# Altium PCB PCB1.(final) (1).PcbDoc (part 1 of 2)
Units mm, origin at the board's own origin, x right, y up, seen from the top; angles counter-clockwise.
Board outline 85 x 55 mm, 2 copper layers (Top Layer, Bottom Layer); 59 components, 57 nets, 310 pads, 123 vias.
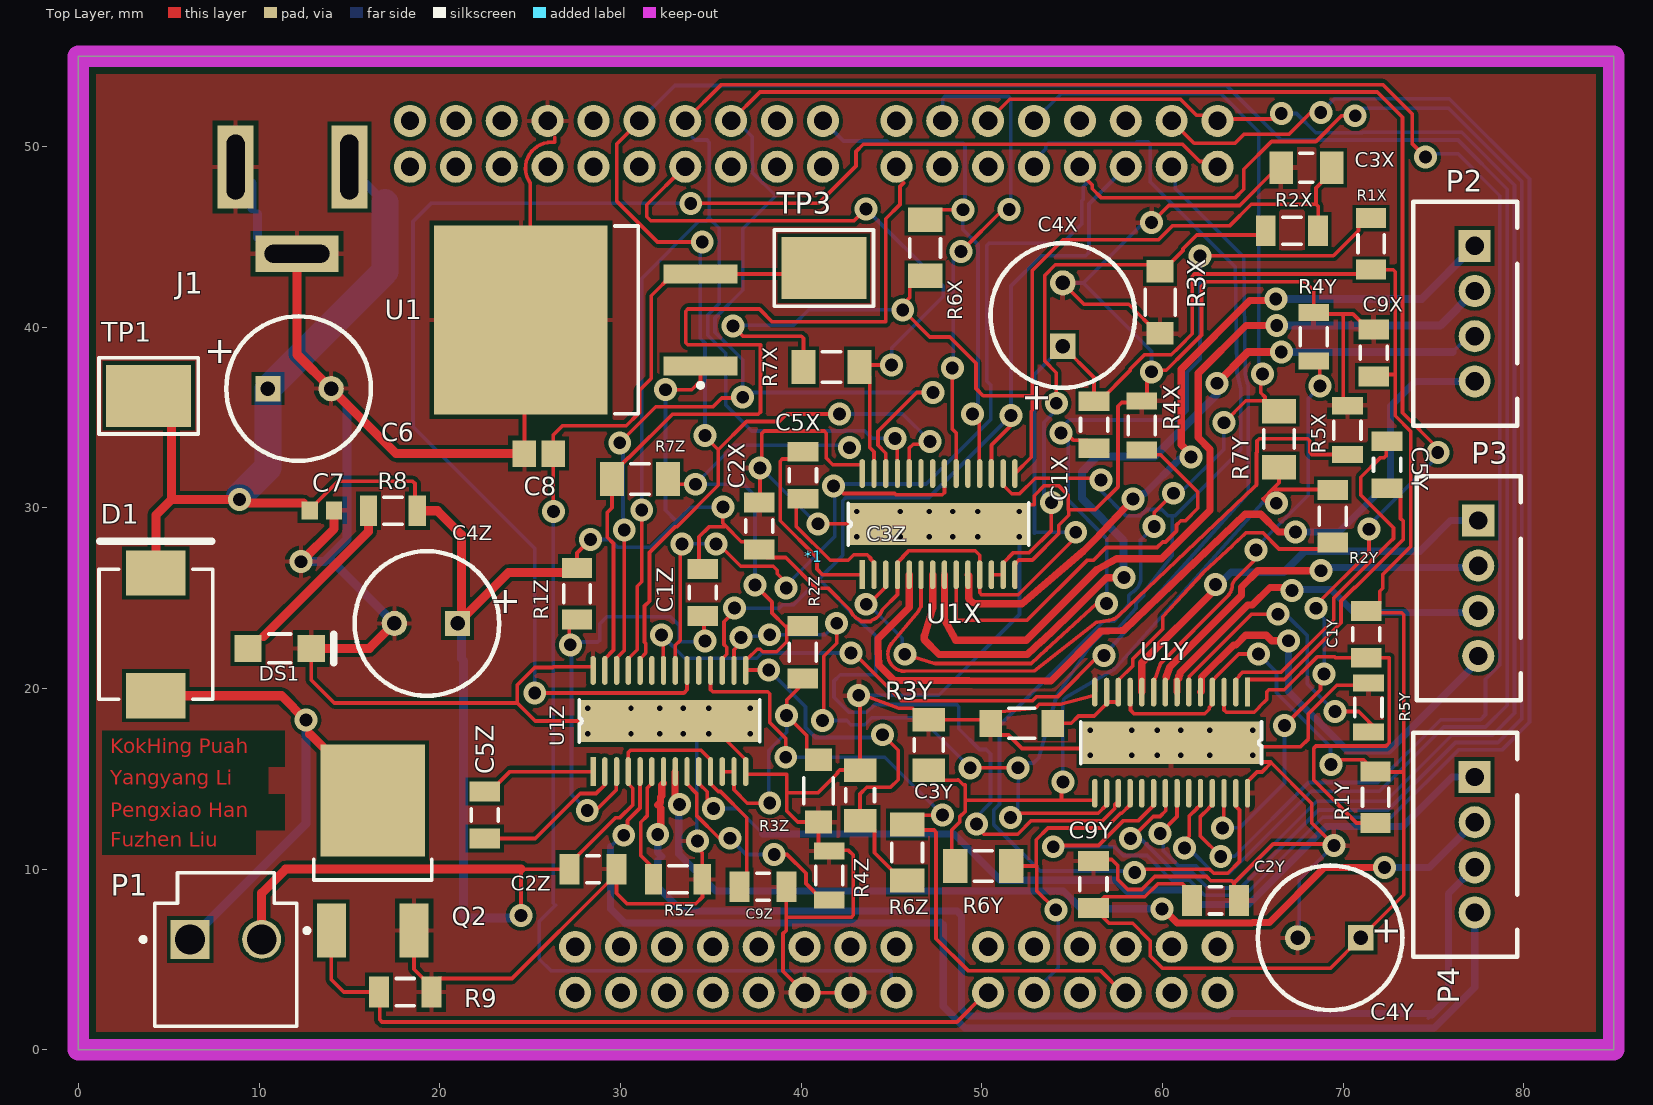
[diagram p0: Top Layer view]
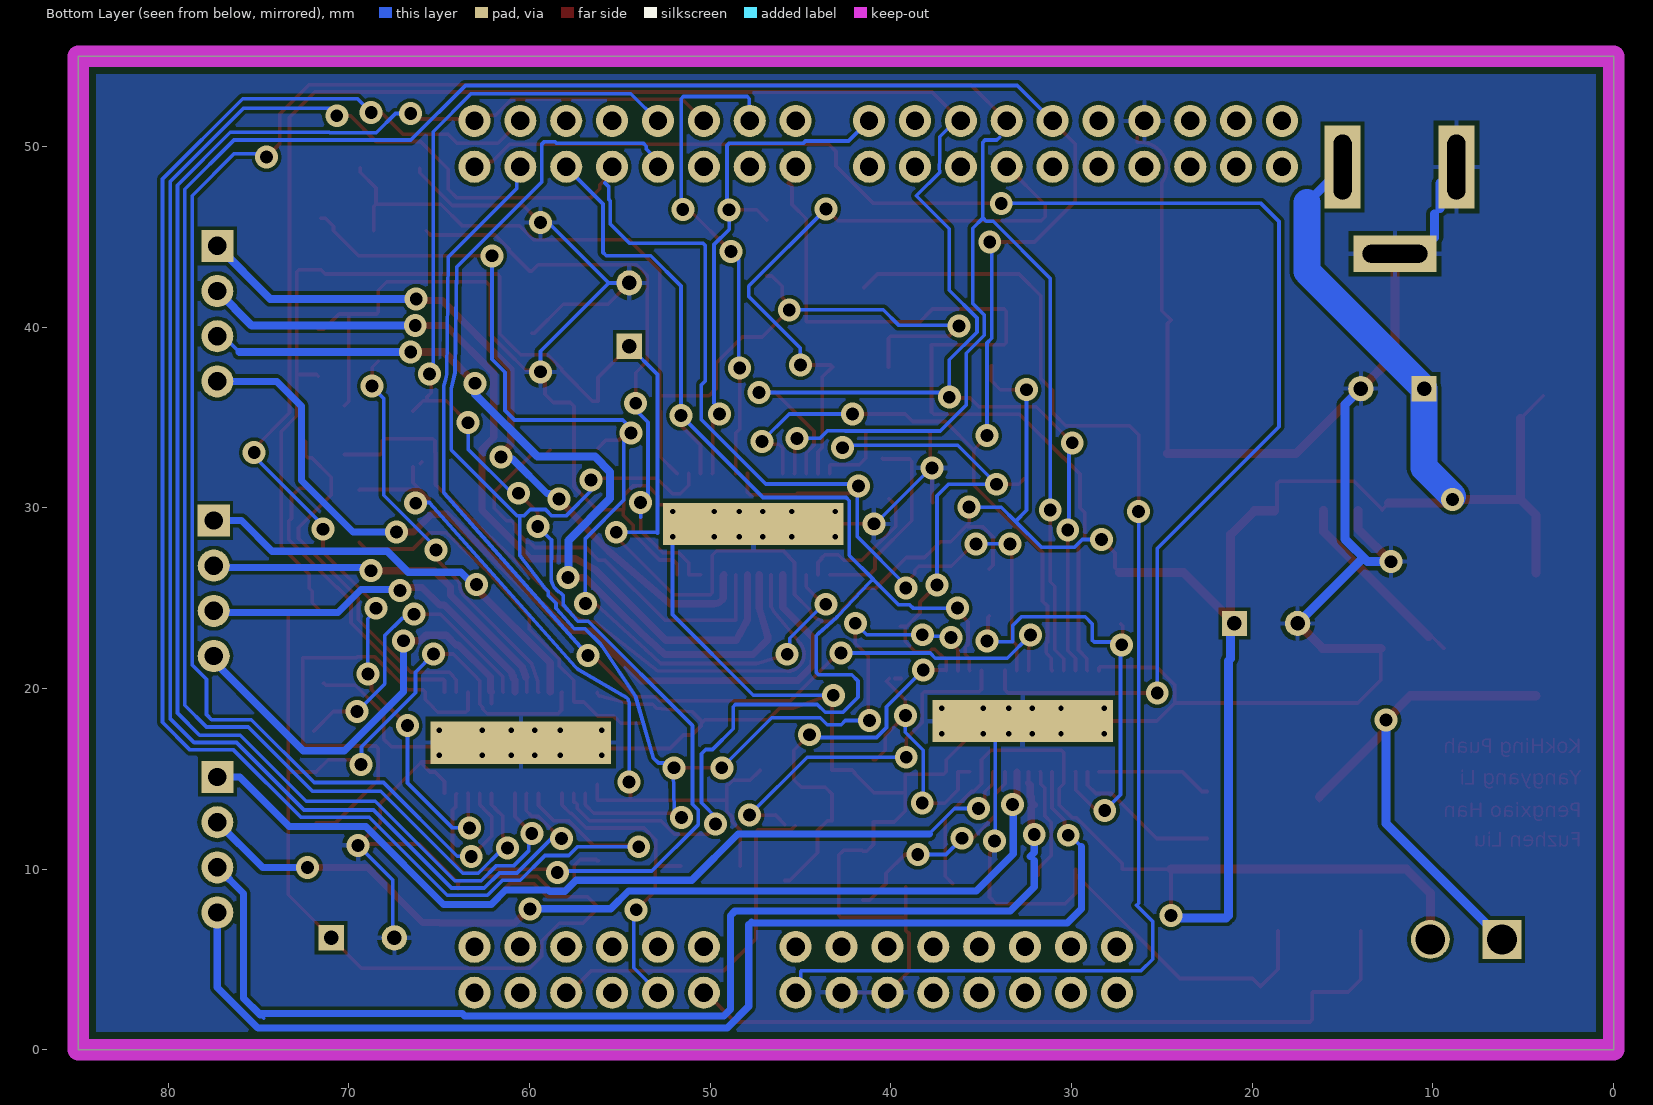
[diagram p1: Bottom Layer view, seen from below]

## Layer stack, top to bottom
Top Solder: solder mask 0.0102, Solder Resist, Dk 3.5
Top Layer: signal copper 0.0356
Dielectric 1: dielectric 0.32, FR-4, Dk 4.8
Bottom Layer: signal copper 0.0356
Bottom Solder: solder mask 0.0102, Solder Resist, Dk 3.5

## Board outline
-0.011,0 84.989,0 84.989,55 -0.011,55
cut-out: -0.025,55

## Design rules (kind name [scope] priority, off if disabled: settings)
BoardOutlineClearance [All] p1: gap=1 ignorepadtopadclearanceinfootprint=FALSE
Clearance [All] p1: gap=0.203 ignorepadtopadclearanceinfootprint=FALSE
HoleSize [All] p1: absolutevalues=TRUE maxlimit=2.54 minlimit=0.305 maxpercent=80.000 minpercent=20.000
MinimumAnnularRing [All] p1: minimumring=0.152
PlaneConnect PlaneConnect_1 [All] p1: planeconnectstyle=Relief reliefexpansion=0.508 reliefentries=4 reliefconductorwidth=0.254 reliefairgap=0.254
PlaneConnect [(InComponent('U1X') OR InComponent('U1Y') OR InComponent('U1Z'))] p2: planeconnectstyle=Direct reliefexpansion=0.508 reliefentries=4 reliefconductorwidth=0.254 reliefairgap=0.254
PolygonConnect [All] p1: connectstyle=Relief reliefconductorwidth=0.254 reliefentries=4 polygonreliefangle="90 Angle" airgapwidth=0.254
RoutingVias [All] p1: holewidth=0.711 width=1.27 viastyle="Through Hole" minholewidth=0.711 minwidth=1.27 maxholewidth=0.711 maxwidth=1.27
SolderMaskExpansion [All] p1: expansion=0.102 istentingtop=FALSE
Width [All] p1: maxlimit=1.5 minlimit=0.203 preferedwidth=0.203
28 further rules are at their usual default settings.

## Classes and differential pairs
channel class Stepper_Motor_IC_Circuit: X-axis Y-axis Z-axis
component class Z-axis: C1Z C2Z C3Z C4Z C5Z C9Z R1Z R2Z R3Z R4Z R5Z R6Z R7Z U1Z
component class Y-axis: C1Y C2Y C3Y C4Y C5Y C9Y R1Y R2Y R3Y R4Y R5Y R6Y R7Y U1Y
component class X-axis: C1X C2X C3X C4X C5X C9X R1X R2X R3X R4X R5X R6X R7X U1X
component class Sheet_Symbol_Circuit: P2 P3 P4
component class "P_S & R": C6 C7 C8 DS1 J1 R8 TP1 TP3 U1
component class M_B_S_C: D1 P1 Q2 R9

## Components (designator, comment, footprint, x,y, rotation, side; value= is the part's Value field where it differs from the comment)
*1 "*" FRDM-K22F -0.444,0.622 r0 top
C1X "C1206C103K5RACTU" KEMT-1206-2_L 56.219,34.602 r90 top (schematic designator C1)
C1Y "C1206C103K5RACTU" KEMT-1206-2_L 71.289,23 r90 top (schematic designator C1)
C1Z "C1206C103K5RACTU" KEMT-1206-2_L 34.556,25.314 r90 top (schematic designator C1)
C2X "C1206C103K5RACTU" KEMT-1206-2_L 37.689,29 r90 top (schematic designator C2)
C2Y "C1206C103K5RACTU" KEMT-1206-2_L 62.946,8.27 r0 top (schematic designator C2)
C2Z "C1206C103K5RACTU" KEMT-1206-2_L 28.489,10 r0 top (schematic designator C2)
C3X "1206C474K5RACTU" CAPC3216X100X50NL20T25 67.971,48.825 r180 top (schematic designator C3)
C3Y "1206C474K5RACTU" CAPC3216X100X50NL20T25 47.063,16.866 r90 top (schematic designator C3)
C3Z "1206C474K5RACTU" CAPC3216X100X50NL20T25 43.268,14.087 r90 top (schematic designator C3)
C4X "100uF, 50V" "Capacitor radial 8mm" 54.489,38.95 r90 top (schematic designator C4)
C4Y "100uF, 50V" "Capacitor radial 8mm" 70.989,6.2 r180 top (schematic designator C4)
C4Z "100uF, 50V" "Capacitor radial 8mm" 20.989,23.6 r180 top (schematic designator C4)
C5X "C1206C103K5RACTU" KEMT-1206-2_L 40.108,31.806 r90 top (schematic designator C5)
C5Y "C1206C103K5RACTU" KEMT-1206-2_L 72.435,32.385 r270 top (schematic designator C5)
C5Z "C1206C103K5RACTU" KEMT-1206-2_L 22.489,13 r90 top (schematic designator C5)
C6 "100uF, 50V" "Capacitor radial 8mm" 10.489,36.6 r0 top
C7 "330nF" CAPC1608X87X35NL15T15 13.474,29.865 r180 top
C8 "100nF" CAPC2013X88X50NL20T25 25.489,33 r0 top
C9X "C1206C103K5RACTU" KEMT-1206-2_L 71.698,38.58 r90 top (schematic designator C9)
C9Y "C1206C103K5RACTU" KEMT-1206-2_L 56.187,9.159 r90 top (schematic designator C9)
C9Z "C1206C103K5RACTU" KEMT-1206-2_L 37.889,9.022 r0 top (schematic designator C9)
D1 "S5BC-13-F" DIOD-S5xC_V 4.289,23 r90 top
DS1 "HSMH-C150" AVAG-HSMX-C150_V 11.139,22.22 r0 top
J1 "Barrel Jack 5.5x2.1mm" "Barrel Jack 2.1x5.5mm THT" 1.3,48.866 r270 top
P1 "B2P-VH(LF)(SN)" JST-B2P-VH(LF)(SN)_V 8.164,4.71 r0 top
P2 "B4B-XH-A (LF)(SN)" "B4B-XH-A (LF)(SN)" 77.289,44.5 r270 top
P3 "B4B-XH-A (LF)(SN)" "B4B-XH-A (LF)(SN)" 77.489,29.3 r270 top
P4 "B4B-XH-A (LF)(SN)" "B4B-XH-A (LF)(SN)" 77.289,15.1 r270 top
Q2 "NTD6415ANLT4G" ONSC-DPAK-3-369AA-01_V 16.289,11 r90 top
R1X "ERJ-8ENF1004V" RESC3216X70X50NL05T20 71.553,44.611 r270 top (schematic designator R1)
R1Y "ERJ-8ENF1004V" RESC3216X70X50NL05T20 71.806,13.981 r90 top (schematic designator R1)
R1Z "ERJ-8ENF1004V" RESC3216X70X50NL05T20 27.6,25.254 r90 top (schematic designator R1)
R2X "51k R" RESC3216X60X45NL10T20 67.174,45.339 r0 top (schematic designator R2)
R2Y "51k R" RESC3216X60X45NL10T20 69.436,29.537 r90 top (schematic designator R2)
R2Z "51k R" RESC3216X60X45NL10T20 40.098,22 r90 top (schematic designator R2)
R3X "CR1206-FX-3002ELF" FP-CR1206-MFG 59.88,41.383 r90 top (schematic designator R3)
R3Y "CR1206-FX-3002ELF" FP-CR1206-MFG 52.219,18.074 r0 top (schematic designator R3)
R3Z "CR1206-FX-3002ELF" FP-CR1206-MFG 40.965,14.336 r90 top (schematic designator R3)
R4X "0.2R 5% 1206(3216)" RESC1206(3216)_L 58.863,34.561 r90 top value=0.2R (schematic designator R4)
R4Y "0.2R 5% 1206(3216)" RESC1206(3216)_L 68.375,39.472 r90 top value=0.2R (schematic designator R4)
R4Z "0.2R 5% 1206(3216)" RESC1206(3216)_L 41.555,9.647 r90 top value=0.2R (schematic designator R4)
R5X "0.2R 5% 1206(3216)" RESC1206(3216)_L 70.245,34.304 r90 top value=0.2R (schematic designator R5)
R5Y "0.2R 5% 1206(3216)" RESC1206(3216)_L 71.41,18.949 r90 top value=0.2R (schematic designator R5)
R5Z "0.2R 5% 1206(3216)" RESC1206(3216)_L 33.185,9.438 r0 top value=0.2R (schematic designator R5)
R6X "10K 5% 1206(3216)" RESC1206(3216)_M 46.87,44.387 r90 top value=10kR (schematic designator R6)
R6Y "10K 5% 1206(3216)" RESC1206(3216)_M 50.092,10.171 r0 top value=10kR (schematic designator R6)
R6Z "10K 5% 1206(3216)" RESC1206(3216)_M 45.874,10.925 r90 top value=10kR (schematic designator R6)
R7X "10K 5% 1206(3216)" RESC1206(3216)_M 41.689,37.8 r0 top value=10kR (schematic designator R7)
R7Y "10K 5% 1206(3216)" RESC1206(3216)_M 66.461,33.807 r90 top value=10kR (schematic designator R7)
R7Z "10K 5% 1206(3216)" RESC1206(3216)_M 31.089,31.6 r180 top value=10kR (schematic designator R7)
R8 "560R 5% 1206(3216)" RESC1206(3216)_L 17.409,29.84 r0 top value=560R
R9 "51kR" RESC3216X60X45NL10T20 18.089,3.2 r180 top
TP1 "5016" KEYSTONE-5016_V 3.889,36.2 r0 top
TP3 "5016" KEYSTONE-5016_V 41.26,43.267 r0 top
U1 "L7805CD2T-TR" TO-263_M 28.089,40.4 r180 top
U1X "DRV8825" "DRV8825 HTSSOP" 43.389,26.3 r90 top (schematic designator Q1)
U1Y "DRV8825" "DRV8825 HTSSOP" 64.714,19.8 r270 top (schematic designator Q1)
U1Z "DRV8825" "DRV8825 HTSSOP" 28.489,15.4 r90 top (schematic designator Q1)

## Footprints (in the part's own frame and the unit in brackets; to place one, negate y for a bottom-side part, rotate by r counter-clockwise, add the part's x,y. Pads: shape width x height; smd on the part's side, far side on the other; paste and mask are expansions set on the pad)
AVAG-HSMX-C150_V [mm] "SMD, 2-Leads, Body 3.2x1.6mm"
  rect 1.5x1.5 smd: 1(-1.75,0) 2(1.75,0)
  silkscreen extent -0.6,-0.8 3,0.8, body extent -1.6,-0.8 1.6,0.8, height 1.1
"B4B-XH-A (LF)(SN)" [mil] "B4B-XH-A (LF)(SN) Wire-To-Board Connector, Vertical, 2.5 mm, 4 Contacts"
  rect 70x70 hole 40: 1(0,0)
  round 70 hole 40: 2(98.43,0) 3(196.85,0) 4(295.28,0)
  silkscreen extent -96,-134 392,93, body extent -97,-134 391,92, height 276
"Barrel Jack 2.1x5.5mm THT" [mm] "GCT DCJ200-10-A-K1-K"
  rect 4.6x2 hole 1 slot 3.6 at 0 deg: 1(0,13.7) 2(0,7.4)
  rect 2x4.6 hole 1 slot 3.6 at 90 deg: 2(4.8,10.8)
  body extent -4.47,0 5.07,14.3, height 11
"Capacitor radial 8mm" [mm] "Radial electrolytic cap, 8mm body, 3.5mm pin separation"
  rect 1.4x1.4 hole 0.8: 1(0,0)
  round 1.4 hole 0.8: 2(3.5,0)
  silkscreen extent -2.3,-4 5.7,4, body extent -2.2,-4 5.8,4, height 11.5
CAPC1608X87X35NL15T15 [mm] "Chip Capacitor, 2-Leads, Body 1.60x0.80mm, IPC Medium Density"
  rect 0.9x1 smd: 1(-0.675,0) 2(0.675,0)
  body extent -0.87,-0.48 0.87,0.47, height 0.87
CAPC2013X88X50NL20T25 [mm] "Chip Capacitor, 2-Leads, Body 2.00x1.25mm, IPC Medium Density"
  rect 1.3x1.45 smd: 1(-0.8,0) 2(0.8,0)
  body extent -1.1,-0.72 1.1,0.72, height 0.88
CAPC3216X100X50NL20T25 [mm] "Chip Capacitor, 2-Leads, Body 3.20x1.60mm, IPC Medium Density"
  rect 1.3x1.8 smd: 1(-1.4,0) 2(1.4,0)
  silkscreen extent -0.35,-0.8 0.35,0.8, body extent -1.7,-0.9 1.7,0.9, height 1
DIOD-S5xC_V [mm] "Molded Diode, 2-Leads, Body 7.11x6.22mm"
  rect 2.5x3.3 smd: 1(-3.4,0) 2(3.4,0)
  silkscreen extent -3.6,-3.15 5.15,3.15, body extent -3.77,-3.11 3.77,3.11, height 2.5
"DRV8825 HTSSOP" [mm]
  rect 1.6x0.3 smd paste+0 mask+0.07: 1(0,0)
  oval 1.6x0.3 smd paste+0 mask+0.07: 2(0,-0.65) 3(0,-1.3) 4(0,-1.95) 5(0,-2.6) 6(0,-3.25) 7(0,-3.9) 8(0,-4.55) 9(0,-5.2) 10(0,-5.85) 11(0,-6.5) 12(0,-7.15) 13(0,-7.8) 14(0,-8.45) 15(5.6,-8.45) 16(5.6,-7.8) 17(5.6,-7.15) 18(5.6,-6.5) 19(5.6,-5.85) 20(5.6,-5.2) 21(5.6,-4.55) 22(5.6,-3.9) 23(5.6,-3.25) 24(5.6,-2.6) 25(5.6,-1.95) 26(5.6,-1.3) 27(5.6,-0.65) 28(5.6,0)
  round 0.6 hole 0.3: PPAD(2.1,-2.1) PPAD(2.1,0.3) PPAD(2.1,-8.7) PPAD(2.1,-6.4) PPAD(2.1,-5) PPAD(2.1,-3.7) PPAD(3.5,-5) PPAD(3.5,-3.7) PPAD(3.5,-2.1) PPAD(3.5,0.3) PPAD(3.5,-8.7) PPAD(3.5,-6.4)
  rect 2.34x5.18 smd paste+0: PPAD(2.8,-4.225)
  rect 2.34x10 smd paste-100 mask-100: PPAD(2.8,-4.225)
  rect 2.34x10 smd far side paste-100 mask-100: PPAD(2.8,-4.225)
  Top Layer region: 1.1,0.9
  silkscreen extent 1.63,-9.23 3.98,0.77, body extent -0.65,-9.34 6.25,0.87, height 1.11
FP-CR1206-MFG [mm]
  rect 1.25x1.5 smd paste+0 mask+0: 1(-1.725,0) 2(1.725,0)
  silkscreen extent -0.72,-0.82 0.72,0.82, body extent -2.45,-0.92 2.45,0.92, height 0.25
FRDM-K22F [mil] "NXP FRDM-K22F development board"
  round 70 hole 40: J1_1(2500,1900) J1_2(2500,2000) J1_3(2400,1900) J1_4(2400,2000) J1_5(2300,1900) J1_6(2300,2000) J1_7(2200,1900) J1_8(2200,2000) J1_9(2100,1900) J1_10(2100,2000) J1_11(2000,1900) J1_12(2000,2000) J1_13(1900,1900) J1_14(1900,2000) J1_15(1800,1900) J1_16(1800,2000) J2_1(1640,1900) J2_2(1640,2000) J2_3(1540,1900) J2_4(1540,2000) J2_5(1440,1900) J2_6(1440,2000) J2_7(1340,1900) J2_8(1340,2000) J2_9(1240,1900) J2_10(1240,2000) J2_11(1140,1900) J2_12(1140,2000) J2_13(1040,1900) J2_14(1040,2000) J2_15(940,1900) J2_16(940,2000) J2_17(840,1900) J2_18(840,2000) J2_19(740,1900) J2_20(740,2000) J24_1(2000,200) J24_2(2000,100) J24_3(2100,200) J24_4(2100,100) J24_5(2200,200) J24_6(2200,100) J24_7(2300,200) J24_8(2300,100) J24_9(2400,200) J24_10(2400,100) J24_11(2500,200) J24_12(2500,100) J25_1(1100,200) J25_2(1100,100) J25_3(1200,200) J25_4(1200,100) J25_5(1300,200) J25_6(1300,100) J25_7(1400,200) J25_8(1400,100) J25_9(1500,200) J25_10(1500,100) J25_11(1600,200) J25_12(1600,100) J25_13(1700,200) J25_14(1700,100) J25_15(1800,200) J25_16(1800,100)
  body extent 690,50 2550,2050, height 335
JST-B2P-VH(LF)(SN)_V [mm] "THD, 2-Leads, Body 8.5x7.86mm, Pitch 3.96mm"
  rect 2.15x2.15 hole 1.65: 1(-1.98,1.4)
  round 2.15 hole 1.65: 2(1.98,1.4)
  silkscreen extent -4.7,-3.4 3.93,5.1, body extent -3.93,-3.2 3.93,5.3, height 10.9
KEMT-1206-2_L [mm] "SMD, 2-Leads, Body 3.4x1.8mm, IPC High Density"
  rect 1.1x1.7 smd: 1(-1.3,0) 2(1.3,0)
  silkscreen extent -0.35,-0.75 0.35,0.75, body extent -1.7,-0.9 1.7,0.9, height 0.88
KEYSTONE-5016_V [mm] "Testpoint, Body 3.81x2.04 mm"
  rect 4.7x3.43 smd: 1(0,0)
  silkscreen extent -2.75,-2.12 2.75,2.11, body extent -1.9,-1.02 1.9,1.02, height 2.29
ONSC-DPAK-3-369AA-01_V [mm] "DPAK, 3-Leads, Body 6.54x6.095mm, Pitch 2.29mm"
  rect 3x1.6 smd: 1(-4.4,2.29) 3(-4.4,-2.29)
  rect 6.2x5.8 smd: 4(2.8,0)
  silkscreen extent -4.52,-3.27 -0.45,3.76, body extent -1.6,-3.27 4.49,3.27, height 2.47
RESC1206(3216)_L [mm] "Chip Resistor, Body 3.2x1.6mm, IPC High Density"
  rect 0.95x1.7 smd: 1(-1.35,0) 2(1.35,0)
  silkscreen extent -0.5,-0.75 0.5,0.75, body extent -1.67,-0.87 1.67,0.87, height 0.75
RESC1206(3216)_M [mm] "Chip Resistor, Body 3.2x1.6mm, IPC Low Density"
  rect 1.35x1.9 smd: 1(-1.55,0) 2(1.55,0)
  silkscreen extent -0.5,-0.85 0.5,0.85, body extent -1.67,-0.87 1.67,0.87, height 0.75
RESC3216X60X45NL10T20 [mm] "Chip Resistor, 2-Leads, Body 3.20x1.60mm, IPC Medium Density"
  rect 1.1x1.7 smd: 1(-1.45,0) 2(1.45,0)
  silkscreen extent -0.5,-0.75 0.5,0.75, body extent -1.65,-0.85 1.65,0.85, height 0.6
RESC3216X70X50NL05T20 [mm] "Chip Resistor, 2-Leads, Body 3.20x1.60mm, IPC Medium Density"
  rect 1.1x1.65 smd: 1(-1.425,0) 2(1.425,0)
  silkscreen extent -0.5,-0.72 0.5,0.72, body extent -1.63,-0.82 1.62,0.82, height 0.7
TO-263_M [mm] "D2-PAK, 4-Leads, Body 9.2x10.2mm, Pitch 2.54mm, Lead Span 15.4mm, IPC Low Density"
  rect 4.1x1.05 smd: 1(-6.35,2.54) 3(-6.35,-2.54)
  rect 9.6x10.45 smd: 4(3.6,0)
  silkscreen extent -6.48,-5.2 -1.6,5.2, body extent -2.9,-5.2 6.45,5.2, height 4.6

## Part data
*1: library part "NXP FRDM-K22F"
C1X C1Y C1Z C2X C2Y C2Z C9X C9Y C9Z: library part CMP-2000-06008-1, "Surface Mount Multilayer Ceramic Chip Capacitor, X7R Dielectric, 50 V, -55 to 125 degC, 2-Pin SMD (1206), RoHS, Tape and Reel", Capacitance=0.1uF, Case Size=1206(3216mm), Manufacturer=Kemet, Package Description="2-Leads SMD, Body 3.2 x 1.6 mm", Package Reference=1206-2, Temperature Coefficient=X7R, Tolerance=10%, Voltage Rating=50V, Brand/Series=CSeries, Datasheet URL=https://datasheet.ciiva.com/7729/1725435-7729792.pdf, Datasheet Version=07/2013, Dimensions="0.126\"x0.063\"(3.2x1.6mm)LxW", Manufacturer URL=http://www.kemet.com/, Material, Element=Ceramic, Mounting Technology=SurfaceMount, Mounting Type=PCB, Termination=SMD
C3X C3Y C3Z: library part CMP-2000-06016-1, "Chip Capacitor, 470 nF, +/- 10%, 50 V, -55 to 125 degC, 1206 (3216 Metric), RoHS, Tape and Reel", Capacitance - nF=470nF, Capacitance - pF=470000pF, Case Code - in=1206, Case Code - mm=3216, Case Height=0.9mm, Case Length=3.2mm, Case Width=1.6mm, Dielectric=X7R, Manufacturer=Kemet, Maximum Operating Temperature=+125C, Minimum Operating Temperature=-55C, Operating Temperature Range=-55Cto+125C, Package / Case=1206(3216metric), Package Description="2-Pin Surface Mount Device, Body 3.2 x 1.6 mm", Temperature Coefficient / Code=+/-15%, Tolerance=10%, Voltage Rating=50V, Brand=Kemet, Class=2, Datasheet URL=http://www.kemet.com/docfinder?Partnumber=C1206C106K8RACTU, Datasheet Version=02/2016, Dimensions=1.6mmWx3.2mmLx0.9mmH, Factory Pack Quantity=4000, Manufacturer URL=http://www.kemet.com/, Mounting Technology=SurfaceMount, Package Reference=1206, Packaging=Reel, Product=GeneralTypeMLCCs, Product Category=MultilayerCeramicCapacitorsMLCC-SMD/SMT, RoHS=Details, Series=C1206C, Termination Style=SMD/SMT, Type=SMDMLCCsX7R,Commercial, Voltage Rating DC=50V
C4X C4Y C4Z C6: library part "Cap 100uF, 50V, THT radial", "Electrolytic Capacitor, 100 μF, 50 V, ± 20%, Radial Leaded, 8 mm"
C5X C5Y C5Z: library part CMP-2000-06008-1, "Surface Mount Multilayer Ceramic Chip Capacitor, X7R Dielectric, 50 V, -55 to 125 degC, 2-Pin SMD (1206), RoHS, Tape and Reel", Capacitance=0.01uF, Case Size=1206(3216mm), Manufacturer=Kemet, Package Description="2-Leads SMD, Body 3.2 x 1.6 mm", Package Reference=1206-2, Temperature Coefficient=X7R, Tolerance=10%, Voltage Rating=50V, Brand/Series=CSeries, Datasheet URL=https://datasheet.ciiva.com/7729/1725435-7729792.pdf, Datasheet Version=07/2013, Dimensions="0.126\"x0.063\"(3.2x1.6mm)LxW", Manufacturer URL=http://www.kemet.com/, Material, Element=Ceramic, Mounting Technology=SurfaceMount, Mounting Type=PCB, Termination=SMD
C7: library part CMP-2006-03186-1, "C0603C334K4RACTU", Manufacturer=Kemet, Part Number=C0603C334K4RACTU
C8: library part CMP-2007-00279-1, "C0805C104K5RACTU", Manufacturer=Kemet, Part Number=C0805C104K5RACTU
D1: library part CMP-2000-07025-1, "Surface Mount Glass Passivated Rectifier, 5 A, 100 V, -65 to 150 degC, 2-Pin SMC, RoHS, Tape and Reel", Average Rectified Current-Max=5A, Forward Voltage=1.15V, Manufacturer="Diodes Inc", Package Description="2-Pin Molded Component, Body 6.855 x 5.905 mm", Package Reference=S5xC, Peak Current-Max=100A, Reverse Current-Max=10μA, Reverse Voltage-Max [Vrrm]=100V, Datasheet URL=http://www.diodes.com/_files/datasheets/ds16007.pdf, Datasheet Version="Rev. 9-2, 09/2010", Manufacturer URL=http://www.diodes.com/, Mounting Technology=SurfaceMount
DS1: library part CMP-2000-06426-1, "LED Uni-Color Red, 65 mW, 25 mA, -40 to 85 degC, 2-Pin SMD, RoHS, Tape and Reel", Emitting Color=Red, Forward Current=25mA, Forward Voltage=2.6V, Manufacturer=Avago, Operating Temp Range=-40Cto85C, Operating Temperature Classification=Industrial, Package Description="2-Pin Surface Mount Device, Body 3.2 x 1.6 mm", Package Reference=HSMX-C150, Package Type=ChipLed, Power Dissipation=78W, Reverse Voltage=5V, Test Current (It)=20mA, Chip Material=GaAlAs, Datasheet URL=http://media.digikey.com/pdf/Data%20Sheets/Avago%20PDFs/HSMz-Czzz.pdf, Datasheet Version=03/2012, DELETED=Compliant, Dominant Wave Length=639nm, High Brightness=No, Lens Dimensions=2x1.6x0.6mm, Lens Type=ColorlessDiffused, Lum Intensity=17mcd, Luminous Intensity=17mcd, Main Category=ChipLED, Manufacturer URL=http://www.avagotech.com/, Mounting=SurfaceMount, Mounting Technology=SurfaceMount, Number of  Elements=1, Packaging=TapeandReel, Peak Wavelength=660nm, Pin Count=2, Product Depth (mm)=1.6mm, Product Height (mm)=1.1mm, Product Length (mm)=3.2mm, Rad Hardened=No, Shape Type=Rectangular, Type=Uni-Color, Viewing Angle=170deg
J1: "GCT DCJ200-10-A-K1-K"
P1: library part CMP-1755-00002-1, "Male Header, Pitch 3.96 mm, 1 x 2 Position, Height 10.9 mm, Tail Length 3.7 mm, -25 to 85 degC, RoHS, Bulk", Capacitance="27 pF", Case Code (Imperial)=0603, Case Code (Metric)=1608, Max Operating Temperature=125degC, Min Operating Temperature=-55degC, Package Quantity=4000, Resistance="100000000000 Ohm", Tolerance=5%, Type (Capacitors)=C0G, Voltage Rating="50 V", Case/Package=0603, ComponentLink1Description="Manufacturer URL", ComponentLink1URL=http://www.jst.com/home2.html, ComponentLink2Description=Datasheet, ComponentLink2URL=http://www.jst-mfg.com/product/pdf/eng/eVH.pdf, DatasheetVersion=May-16, Height="0.8 mm", Length="1.6 mm", Mount="Surface Mount", PackageDescription="Male Header, Pitch 3.96 mm, 1 x 2 Position, Height 10.9 mm, Tail Length 3.7 mm", PackageReference=B2P-VH(LF)(SN), Packaging="Tape and Reel", Pins=2, Radiation Hardening=No, REACH SVHC="No SVHC", RoHSCompliant=True, Voltage Rating (DC)="50 V", Width="0.8 mm"
P2 P3 P4: library part "B4B-XH-A (LF)(SN) Wire-to-board connector", "Wire-to-board connector, vertical, 2.5mm, 4 contacts"
Q2: library part CMP-1058-00352-1, "N-Channel Power MOSFET, 100 V, 23 A, 56 mOhm, 3-Pin DPAK, Pb-Free, Tape and Reel", Manufacturer="On Semiconductor", Package Type=DPAK-3, Channel Polarity="N Channel", Ciss Typ (pF)=1024, ComponentLink1Description="Manufacturer URL", ComponentLink1URL=http://www.onsemi.com/, ComponentLink2Description=Datasheet, ComponentLink2URL=http://www.onsemi.cn/pub_link/Collateral/NTD6415ANL-D.PDF, ComponentLink3Description="Package Specification", ComponentLink3URL=http://www.onsemi.cn/pub_link/Collateral/369AA.PDF, Configuration=Single, Coss Typ (pF)=156, Crss Typ (pF)=70, DatasheetVersion="Rev. 1", ID Max (A)=23, Mounting Technology="Surface Mount", PackageDescription="3-Pin Flange Mount, Body 6.54 x 6.095 mm, Pitch 2.29 mm", PackageReference=DPAK-3-369AA-01, PackageVersion="Rev. B, 06/2010", Packing="Tape and Reel", PartNumber=NTD6415ANLT4G, PD Max (W)=83, Qrr Typ (nC)=152, RoHS=Pb-Free, VGS Max (V)=20, VGS(th) Max (V)=2
R1X R1Y R1Z: library part CMP-2003-00020-1, Manufacturer=Panasonic, Resistance=1MR, Part Number=ERJ-8ENF1004V
R2X R2Y R2Z R9: library part CMP-2003-02261-1, "CRCW120651K0JNEA", Manufacturer="Vishay Dale", Part Number=CRCW120651K0JNEA
R3X R3Y R3Z: library part CMP-07231-000998-1, "Thick Film Chip Resistors 1206 30kΩ 0.25W 1% 100ppm/°C", Case Code (Imperial)=1206, Case Code (Metric)=3216, Max Operating Temperature=155°C, Max Power Dissipation=250mW, Min Operating Temperature=-55°C, Package Quantity=5000, Resistance=30kR, Temperature Coefficient=100ppm/°C, Tolerance=1%, Voltage Rating=200V, Case/Package=1206, Composition="Thick Film", Contact Plating=Tin, Depth=1.6mm, Height=0.03inch, Length=3.2mm, Military Standard=Not, Mount="Surface Mount", Number of Terminations=2, Packaging="Tape and Reel", Power Rating=250mW, Radiation Hardening=No, Termination=SMD/SMT, Thickness=610um, Width=1.6mm
R4X R4Y R4Z R5X R5Y R5Z: library part CMP-1014-00057-1, "0.2R 0.25W 5% 1206 (3216 Metric)  SMD", Case-EIA=1206, Case-Metric=3216, Power="0.25 W", Tolerance="5 %", Technology=SMT
R6X R6Y R6Z R7X R7Y R7Z: library part CMP-1014-00098-1, "10K 0.25W 5% 1206 (3216 Metric)  SMD", Case-EIA=1206, Case-Metric=3216, Power="0.25 W", Tolerance="5 %", Technology=SMT
R8: library part CMP-1014-00068-1, "560R 0.25W 5% 1206 (3216 Metric)  SMD", Case-EIA=1206, Case-Metric=3216, Power="0.25 W", Tolerance="5 %", Technology=SMT
TP1 TP3: library part CMP-2000-05178-1, "Test Point, 1-Pin SMT, RoHS, Tape and Reel", Manufacturer=Keystone, Package Description="1-Pin Test Point, Body 3.81 x 2.04 mm", Standard Package=1, Catalog Drawings="5016Top /  / 5016Side /  / 5016Front", Category=TestandMeasurement, Datasheet URL=https://ciiva.com/datasheet-click-2917613?src=ciiva&sig=4a4e90f, Datasheet Version="Rev. D, 03/2014", Family=TestPoints, Featured Product="SurfaceMountTestPoints /  / 5019MiniatureSurfaceMountTestPoint", Manufacturer URL=http://www.keyelco.com/, Material=PhosphorBronze, Mounting Type=SurfaceMount, Online Catalog=SurfaceMountTestPoints, Other Names=5016KDKR, Package Reference=5016, Packaging=Digi-Reel, RoHS Information=RoHSComplianceStatement, Terminal="0.015\"(0.38mm)PhosphorBronze,SilverPlated", Type=PCTestPoint,Compact
U1: library part CMP-0244-00213-1, "Positive Voltage Regulator, 3-Pin D2PAK, Tape and Reel", ComponentLink1Description="Manufacturer URL", ComponentLink1URL=http://www.st.com, ComponentLink2Description=Datasheet, ComponentLink2URL=http://www.st.com/internet/com/TECHNICAL_RESOURCES/TECHNICAL_LITERATURE/DATASHEET/CD00000444.pdf, DatasheetVersion=16/11/2011, PackageDescription="3-Pin Transistor Outline Package 2.54 mm Pitch, 15.4 mm Lead Span (D2PAK)", PackageReference=TO-263, PackageVersion=2011
U1X U1Y U1Z: library part "Stepper motor driver DRV8824", "TI DRV8825 Stepper Motor Controller IC"

## Via types
v1: diameter 1.27, hole 0.711, Top Layer to Bottom Layer, 123 vias

## Nets (pads, with @x,y where several pads share a name; then routed paths per layer and width w, separated by ;. In a path a pad name is that pad's centre, name@x,y a point inside that pad or via, vN(x,y) a via of type N, cw(c..) or ccw(c..) an arc to the next point about the centre after c; other vN are vias at no path point)
DIR_1: *1.J1_14 U1X.20 | length 27.5
  Top Layer w0.203: v1(48.374,37.734) 48.374,34.358 48.589,34.143 U1X.20@48.589,31.9 ; v1(48.856,44.186) 51.168,46.497 51.498,46.497 v1(51.523,46.523)
  Bottom Layer w0.203: *1.J1_14@47.878,51.384 47.84,51.422 47.84,52.652 47.959,52.771 51.493,52.771 51.612,52.652 51.612,46.612 v1(51.523,46.523) ; v1(48.374,37.734) 48.424,37.785 48.424,43.754 v1(48.856,44.186)
DIR_2: *1.J1_4 U1Y.20 | length 91.9
  Top Layer w0.203: v1(53.962,11.242) 54.033,11.313 56.47,11.313 57.845,12.689 58.679,12.689 59.514,13.524 U1Y.20@59.514,14.2 ; *1.J1_4@60.516,51.422 61.758,50.18 64.02,50.18 64.528,50.688 67.025,50.688 68.219,51.882 v1(68.77,51.882)
  Bottom Layer w0.203: v1(53.962,11.242) 57.357,11.242 57.839,10.759 59.151,10.759 60.526,9.385 61.503,9.385 62.338,8.55 64.556,8.55 68.874,12.868 72.656,12.868 76.39,16.601 78.803,16.601 80.327,18.125 80.327,48.199 75.882,52.644 69.532,52.644 v1(68.77,51.882)
DIR_3: *1.J1_1 U1Z.20 | length 85.9
  Top Layer w0.203: v1(25.26,19.751) 33.515,19.751 33.689,19.925 U1Z.20@33.689,21 ; v1(33.896,46.853) 40.972,46.853 43.04,48.921 43.04,49.723 43.446,50.129 61.111,50.129 62.067,49.174 63.02,49.174 *1.J1_1@63.068,49.126 ; *1.J1_1@63.158,48.678 *1.J1_1@63.158,48.935
  Bottom Layer w0.203: v1(25.26,19.751) 25.26,27.752 18.521,34.491 18.521,45.854 19.519,46.853 v1(33.896,46.853)
ENABLE: *1.J1_7 U1X.21 U1Y.21 U1Z.21 | length 146.4
  Top Layer w0.203: U1Z.21@33.039,21 33.039,22.391 33.311,22.664 33.311,27.904 v1(33.413,28.006) ; v1(35.293,28.006) 35.42,28.006 36.664,26.761 38.468,26.761 38.687,26.542 38.687,26.348 39.179,25.856 v1(39.179,25.568) ; v1(41.796,31.212) 41.917,31.212 42.334,30.795 45.185,30.795 45.257,30.724 47.819,30.724 47.939,30.843 47.939,31.864 47.942,31.867 47.942,31.897 U1X.21@47.939,31.9 ; *1.J1_7@55.436,48.882 55.436,48.56 56.12,47.877 56.12,47.667 56.629,47.158 64.02,47.158 64.503,47.64 64.503,48.738 66.046,50.282 68.499,50.282 69.921,51.704 v1(70.675,51.704) ; v1(58.229,11.699) 58.271,11.699 59.49,12.918 59.871,12.918 60.182,13.229 60.182,14.181 U1Y.21@60.164,14.2
  Bottom Layer w0.203: v1(33.413,28.006) v1(35.293,28.006) ; v1(39.179,25.568) 39.179,25.72 41.871,28.412 41.871,31.137 v1(41.796,31.212) 41.904,31.32 46.933,31.32 50.492,34.88 50.492,36.809 50.279,37.023 50.279,44.524 50.398,44.643 54.47,44.643 55.536,45.71 55.536,46.993 55.613,47.069 55.613,47.764 55.829,47.98 ; v1(58.229,11.699) 58.789,11.699 60.697,9.791 61.672,9.791 62.507,8.956 64.325,8.956 68.643,13.274 72.488,13.274 76.221,17.008 78.574,17.008 79.902,18.335 79.902,48.049 75.836,52.115 71.086,52.115 v1(70.675,51.704)
FAULT_X: *1.J2_2 R6X.2 U1X.18 | length 29.5
  Top Layer w0.203: R6X.2@46.87,45.937 47.43,46.497 v1(48.958,46.497) ; v1(49.487,35.204) 49.87,34.82 49.87,31.919 U1X.18@49.889,31.9
  Bottom Layer w0.203: *1.J2_2@41.274,51.384 42.351,50.307 44.726,50.307 44.844,50.19 48.94,50.19 49.072,50.058 49.072,46.612 v1(48.958,46.497) 48.958,45.413 49.796,44.575 49.796,35.801 49.487,35.492 v1(49.487,35.204)
FAULT_Y: *1.J24_4 R6Y.2 U1Y.18 | length 17.7
  Top Layer w0.203: R6Y.2@51.642,10.171 53.014,10.171 53.039,10.196 ; *1.J24_4@52.896,3.162 *1.J24_4@52.896,3.302 ; v1(54.101,7.749) 53.039,8.812 53.039,10.196 ; U1Y.18@58.214,14.2 58.214,13.557 57.752,13.095 57.677,13.095 56.864,12.282 53.673,12.282 53.022,11.631 53.022,10.213 53.039,10.196
  Bottom Layer w0.203: *1.J24_4@52.908,3.203 54.241,4.536 54.241,7.61 v1(54.101,7.749) ; *1.J24_4@52.998,2.958 *1.J24_4@52.998,3.012
FAULT_Z: *1.J24_8 R6Z.2 U1Z.18 | length 40.5
  Top Layer w0.203: U1Z.18@34.989,21 34.989,19.946 35.108,19.827 38.145,19.827 38.264,19.708 38.264,18.117 39.153,17.228 v1(39.153,16.195) ; R6Z.2@45.3,12.402 45.538,12.164 47.356,12.164 47.475,12.045 47.475,6.146 49.237,4.384 56.578,4.384 *1.J24_8@57.813,3.149 ; R6Z.2@45.874,12.475 46.393,12.995 46.394,12.993 v1(47.837,12.993) ; *1.J24_8@57.979,3.39 *1.J24_8@58.154,3.39
  Bottom Layer w0.203: v1(39.153,16.195) 44.635,16.195 v1(47.837,12.993)
GND: *1.J2_14 *1.J25_12 *1.J25_14 C2X.2 C2Y.2 C2Z.2 C3X.2 C3Y.2 C3Z.2 C4X.2 C4Y.2 C4Z.2 C6.2 C7.1 C8.1 C9X.2 C9Y.2 C9Z.2 DS1.2 J1.2 Q2.3 R3X.1 R3Y.1 R3Z.1 R4X.2 R4Y.2 R4Z.2 R5X.2 R5Y.2 R5Z.2 R9.1 U1.4 U1X.14 U1X.28 U1X.PPAD U1Y.14 U1Y.28 U1Y.PPAD U1Z.14 U1Z.28 U1Z.PPAD | length 363.7
  Top Layer w0.203: DS1.2@12.889,22.22 12.889,20.471 14.16,19.2 24.289,19.2 ; Q2.3@18.579,6.6 18.579,4.46 19.539,3.5 19.987,3.948 24.001,3.948 29.304,9.252 29.34,9.252 C2Z.2@29.789,9.7 ; C8.1@24.689,33 24.689,40.2 U1.4@24.489,40.4 25.006,40.917 25.006,47.925 25.006,47.987 cw(c26.176,48.806) 26.179,50.235 26.365,50.235 26.365,50.52 ; U1Z.28@28.489,21 28.489,21.155 28.444,21.2 26.289,21.2 26.256,21.167 25.256,21.167 24.289,20.2 24.289,19.2 ; C2Z.2@29.789,10 C2Z.2@29.789,9.7 ; v1(34.27,11.551) 34.27,11.36 34.171,11.262 34.535,10.899 R5Z.2@34.535,9.438 ; R5Z.2@34.545,9.438 34.545,8.462 34.175,8.092 30.365,8.092 29.789,8.669 C2Z.2@29.789,9.7 ; C2X.2@37.689,30.3 37.731,30.342 v1(37.731,32.197) 37.833,32.299 37.833,34.127 37.96,34.254 41.269,34.254 41.389,34.135 41.389,32.756 41.755,32.389 43.344,32.389 43.389,32.344 U1X.28@43.389,31.9 ; C9Z.2@39.189,9.022 39.189,7.33 ; *1.J25_12@39.43,3.178 *1.J25_12@39.771,2.838 ; *1.J25_12@39.872,2.838 *1.J25_12@40.217,2.493 ; *1.J25_12@40.879,3.162 *1.J25_12@40.196,3.162 39.003,4.355 39.003,6.435 39.189,6.621 39.189,7.33 ; v1(40.931,29.117) 47.596,29.117 U1X.PPAD@47.614,29.1 48.351,29.837 48.682,30.168 52.903,30.168 52.903,30.666 53.469,31.232 54.248,31.232 54.798,30.682 54.798,29.912 54.82,29.891 ; *1.J25_12@40.955,3.162 *1.J25_14@42.736,3.162 ; v1(43.192,19.624) v1@43.217,19.599 ; R3Y.1@50.494,18.199 51.017,18.722 51.058,18.722 52.972,18.909 53.192,19.129 54.361,19.129 56.144,19.59 56.264,19.709 U1Y.14@56.264,19.8 ; U1X.14@51.839,26.3 51.839,26.899 52.057,27.117 52.806,27.117 54.265,28.576 54.265,29.039 54.82,29.594 54.82,29.891 ; C4X.2@54.489,42.45 55.664,41.275 58.137,41.275 59.755,39.658 R3X.1@59.88,39.658 ; C9Y.2@56.187,10.459 56.252,10.459 56.324,10.531 57.206,10.531 57.53,10.207 57.53,9.428 58.08,8.878 58.859,8.878 59.572,9.591 62.446,9.591 62.675,9.362 63.834,9.362 63.966,9.23 ; v1(59.397,45.786) 60.35,46.739 64.277,46.739 66.089,48.55 C3X.2@66.089,48.8 ; U1Y.PPAD@59.751,17.737 U1Y.PPAD@60.489,17 ; U1Y.PPAD@62.614,16.3 62.614,16.295 U1Y.PPAD@62.977,15.932 ; C2Y.2@63.966,8.93 63.966,9.23 ; U1Y.28@64.714,14.2 64.714,14.85 65.243,15.379 65.516,15.379 66.027,15.89 ; R5X.2@70.245,35.654 70.014,35.885 70.014,40.612 69.895,40.731 ; R5Y.2@71.41,20.299 71.293,20.183 69.659,20.183 68.084,18.608 68.084,17.211 67.652,16.779 U1Y.PPAD@60.709,16.779 ; C9X.2@71.698,39.88 71.398,39.88 70.547,40.731 69.895,40.731 ; 24.289,19.2 25.289,18.2 U1Z.PPAD@32.714,18.2 33.451,17.462 33.782,17.132 35.857,17.132 36.939,16.05 U1Z.14@36.939,15.4 37.083,15.255 39.208,15.255 39.208,14.237 ; 39.189,7.33 42.768,7.33 42.887,7.449 42.887,10.785 42.633,11.039 41.597,11.039 R4Z.2@41.555,10.997 41.338,10.997 40.965,11.371 R3Z.1@40.965,12.611 39.817,12.611 39.208,13.219 39.208,14.237 ; 39.208,14.237 40.947,14.237 42.019,15.31 42.019,15.368 42.138,15.487 C3Z.2@43.268,15.487 43.268,19.548 v1@43.217,19.599 ; v1@43.217,19.599 43.555,19.599 45.401,18.909 46.171,18.909 46.813,18.266 C3Y.2@47.063,18.266 50.301,18.266 50.431,18.136 R3Y.1@50.494,18.074 50.494,17.949 51.017,17.426 51.486,17.426 52.234,16.678 60.166,16.678 U1Y.PPAD@60.489,17 ; 54.82,29.891 56.275,29.891 57.545,31.161 57.545,35.628 57.746,35.829 58.699,35.829 59.154,36.284 59.154,36.999 59.397,37.242 v1(59.397,37.531) 59.484,37.618 60.221,37.618 61.341,38.738 61.341,38.741 62.166,39.566 62.166,42.263 62.412,42.509 67.906,42.509 68.375,42.041 R4Y.2@68.375,40.822 68.465,40.731 69.895,40.731 ; U1Y.PPAD@60.489,17 U1Y.PPAD@60.709,16.779 ; U1Y.PPAD@60.709,16.779 60.946,16.543 61.101,16.387 61.557,15.932 U1Y.PPAD@62.977,15.932 ; U1Y.PPAD@62.977,15.932 65.985,15.932 66.027,15.89 ; 63.966,9.23 66.131,11.394 69.43,11.394 68.262,12.563 68.262,13.655 66.027,15.89
  Top Layer w0.5: J1.2@12.1,44.066 12.1,38.489 C6.2@13.989,36.6 17.589,33 C8.1@24.689,33 ; v1(12.32,27.02) 14.149,28.849 C7.1@14.149,29.865 ; DS1.2@12.889,22.22 16.109,22.22 C4Z.2@17.489,23.6
  Bottom Layer w0.203: J1.2@8.7,48.866 J1.2@9.598,47.968 ; J1.2@9.598,46.568 9.902,46.265 ; J1.2@9.902,44.965 10.8,44.066 J1.2@12.1,44.066 ; 13.615,27.02 14.069,27.02 ; U1Z.PPAD@33.489,17.5 33.851,17.5 34.219,17.132 34.219,11.601 v1(34.27,11.551) ; v1(37.731,32.197) 37.791,32.197 40.871,29.117 v1(40.931,29.117) ; v1(43.192,19.624) 47.62,19.624 52.089,24.093 U1X.PPAD@52.089,28.4 ; C4X.2@54.489,42.45 55.622,42.45 ; v1(59.397,37.531) 59.397,38.675 55.622,42.45 ; v1(59.397,45.786) 58.958,45.786 55.622,42.45 ; C4Y.2@67.489,6.2 67.57,6.282 67.57,9.382 v1(69.506,11.318)
  Bottom Layer w0.5: J1.2@9.598,46.568 J1.2@9.598,47.968 ; J1.2@9.902,44.965 9.902,46.265 ; v1(12.32,27.02) 13.615,27.02 14.87,28.275 14.87,35.719 C6.2@13.989,36.6 ; 14.069,27.02 C4Z.2@17.489,23.6
HOME_X: *1.J2_7 R7X.2 U1X.27 | length 35.9
  Top Layer w0.203: *1.J2_7@33.524,48.844 31.457,46.777 31.457,46.116 31.686,45.888 42.93,45.888 43.59,46.548 v1(43.598,46.548) ; *1.J2_7@33.651,48.945 *1.J2_7@33.781,48.945 ; U1X.27@44.039,31.9 44.039,33.104 43.812,33.331 43.812,37.227 R7X.2@43.239,37.8 43.346,37.908 v1(45.017,37.908)
  Bottom Layer w0.203: v1(43.598,46.548) 47.872,42.275 47.872,41.703 45.017,38.848 v1(45.017,37.908)
HOME_Y: *1.J1_10 R7Y.2 U1Y.27 | length 80.1
  Top Layer w0.203: v1(58.47,9.817) 58.76,9.817 58.94,9.997 62.615,9.997 62.843,9.769 63.622,9.769 64.274,10.421 64.274,13.271 64.082,13.463 64.082,14.144 U1Y.27@64.045,14.181 ; v1(59.55,28.971) 59.55,29.741 v1(60.616,30.808) ; v1(63.406,34.714) 64.623,35.931 R7Y.2@65.888,35.931 ; v1(65.535,37.41) 65.442,37.318 65.442,36.376 65.685,36.134 65.685,35.931 R7Y.2@65.888,35.931 ; R7Y.2@66.461,35.357 66.154,35.665 R7Y.2@65.888,35.931
  Bottom Layer w0.203: *1.J1_10@52.896,51.422 54.398,52.923 63.243,52.923 65.341,50.825 65.341,37.613 65.341,37.53 65.46,37.41 v1(65.535,37.41) ; v1(58.47,9.817) 58.392,9.896 53.242,9.896 50.66,12.478 50.66,13.266 50.99,13.597 50.99,17.948 56.762,23.72 57.337,23.72 58.135,24.621 58.135,25.096 58.135,25.144 58.254,25.263 58.401,25.364 ccw(c57.868,26.138) 58.807,26.146 58.794,28.048 58.794,28.216 58.854,28.276 v1(59.55,28.971) ; v1(60.616,30.808) 60.967,30.808 63.406,33.247 v1(63.406,34.714)
HOME_Z: *1.J1_15 R7Z.2 U1Z.27 | length 50.1
  Top Layer w0.203: U1Z.27@29.139,21 29.17,21.032 29.17,21.682 29.618,22.13 29.618,28.033 29.273,28.379 29.273,29.743 29.539,30.009 R7Z.2@29.539,31.6 29.539,31.875 30.445,32.781 30.475,32.781 32.879,35.185 36.817,35.185 36.818,35.186 37.636,35.186 37.755,35.305 37.755,39.025 33.739,39.025 33.62,39.144 33.62,40.886 33.739,41.005 37.695,41.005 37.755,40.945 38.407,40.293 44.689,40.293 44.689,46 45.475,46.786 45.475,47.786 45.669,47.98
MODEL_0: *1.J2_10 U1X.24 U1Y.24 U1Z.24 | length 158.1
  Top Layer w0.203: *1.J2_10@31.064,51.409 29.806,50.152 29.806,46.964 32.051,44.719 v1(34.531,44.719) ; U1Z.24@31.089,21 31.12,21.032 31.12,21.682 31.41,21.972 31.41,22.499 31.339,22.571 31.339,24.564 31.61,24.834 31.61,27.532 33.024,28.946 33.116,28.946 35.42,31.249 35.42,33.213 ; v1(34.683,34) 34.683,33.95 35.42,33.213 ; v1(42.13,35.194) 39.204,35.194 38.79,34.78 36.987,34.78 35.42,33.213 ; U1X.24@45.989,31.9 45.989,33.309 46.205,33.526 46.991,33.526 v1(47.145,33.68) ; v1(61.226,11.166) 61.43,11.37 61.43,11.768 61.48,11.818 61.48,12.923 61.918,13.362 61.918,13.383 62.037,13.502 62.039,13.502 62.114,13.576 U1Y.24@62.114,14.2
  Bottom Layer w0.203: *1.J2_10@31.052,51.422 33.011,53.381 63.554,53.381 66.577,50.358 76.364,50.358 79.089,47.634 79.089,19.072 77.884,17.867 75.572,17.867 72.021,14.315 68.245,14.315 63.698,9.769 62.843,9.769 61.446,11.166 v1(61.226,11.166) ; v1(34.531,44.719) 34.422,44.611 34.422,39.389 34.683,39.129 v1(34.683,34) ; v1(42.13,35.194) 45.631,35.194 v1(47.145,33.68)